# Altium PCB RF Board with STM32..PcbDoc
Units mm, origin at the board's own origin, x right, y up, seen from the top; angles counter-clockwise.
Board outline 40.39 x 30.25 mm, 4 copper layers (Top Layer, Layer 1, Layer 2, Bottom Layer), stack 0.603 mm thick; 36 components, 32 nets, 153 pads, 44 vias.
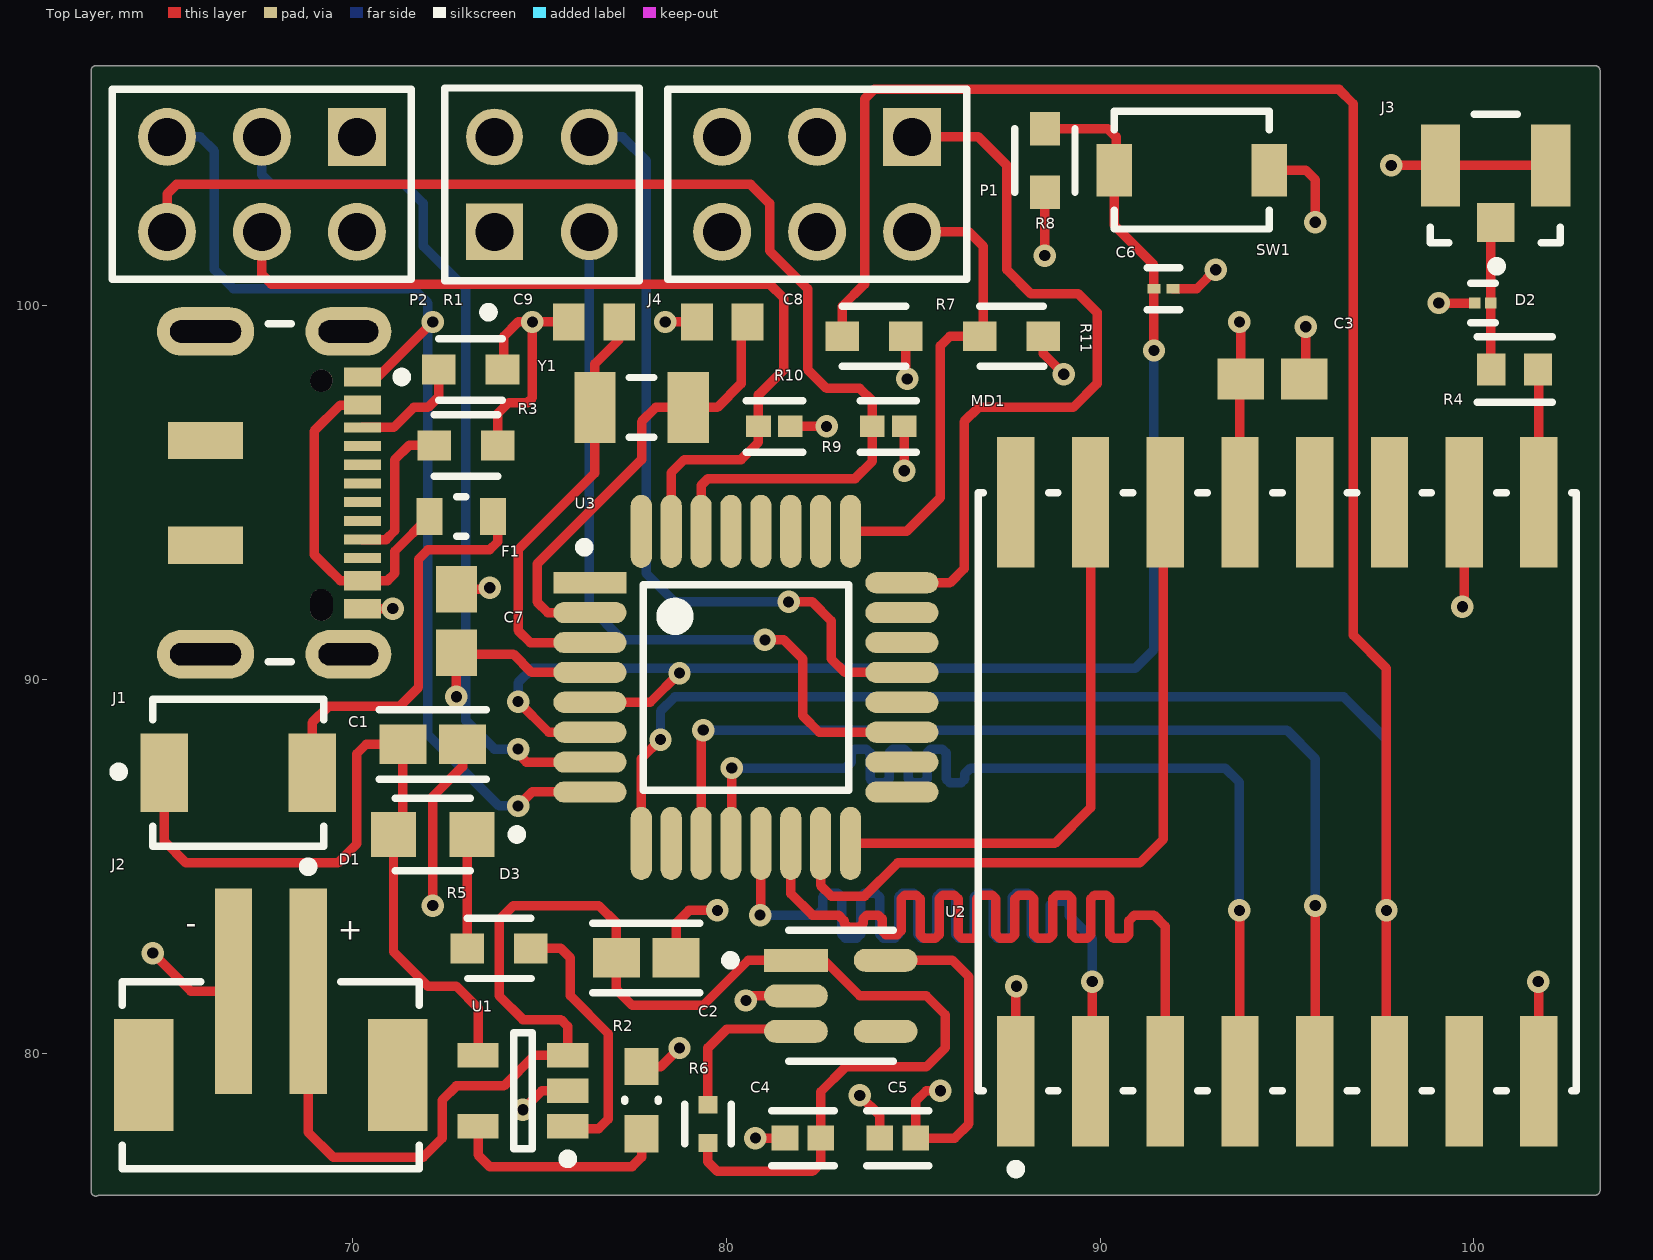
[diagram p0: Top Layer view]
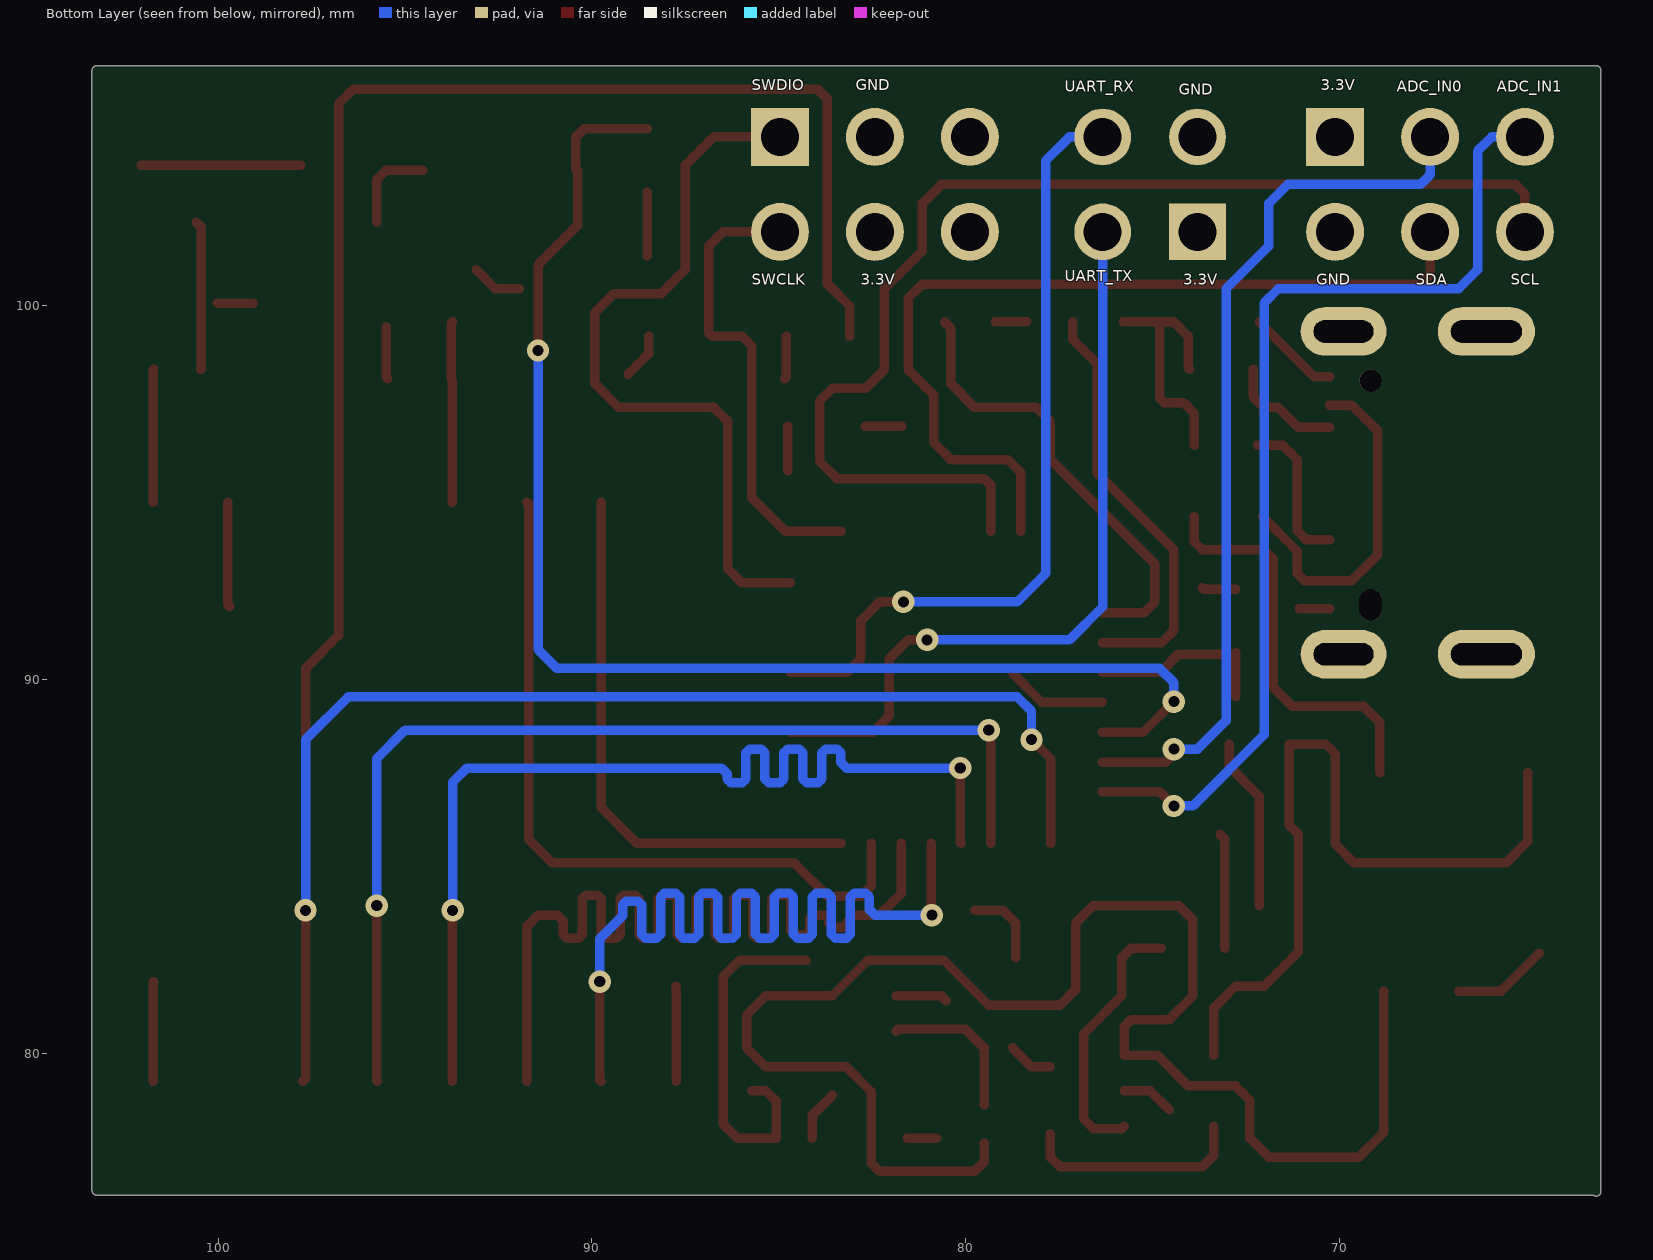
[diagram p1: Bottom Layer view, seen from below]
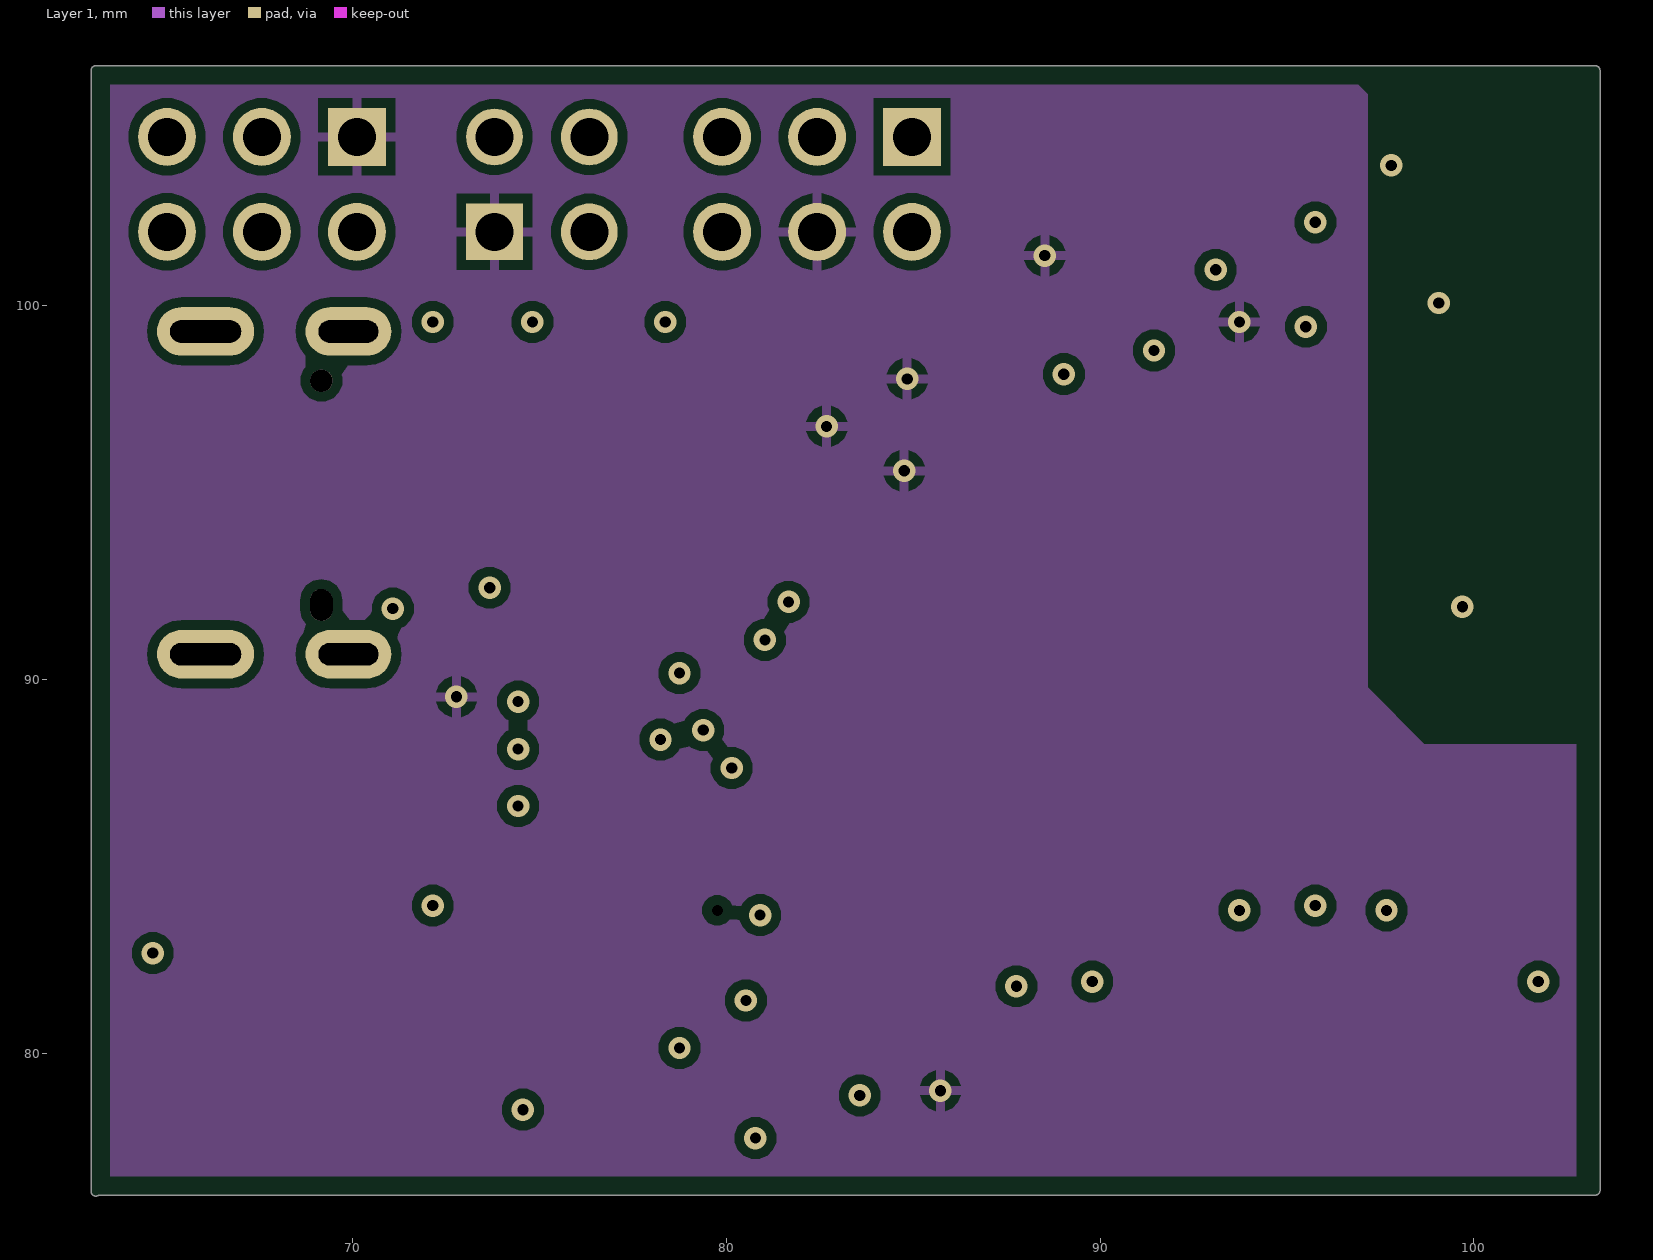
[diagram p2: Layer 1]
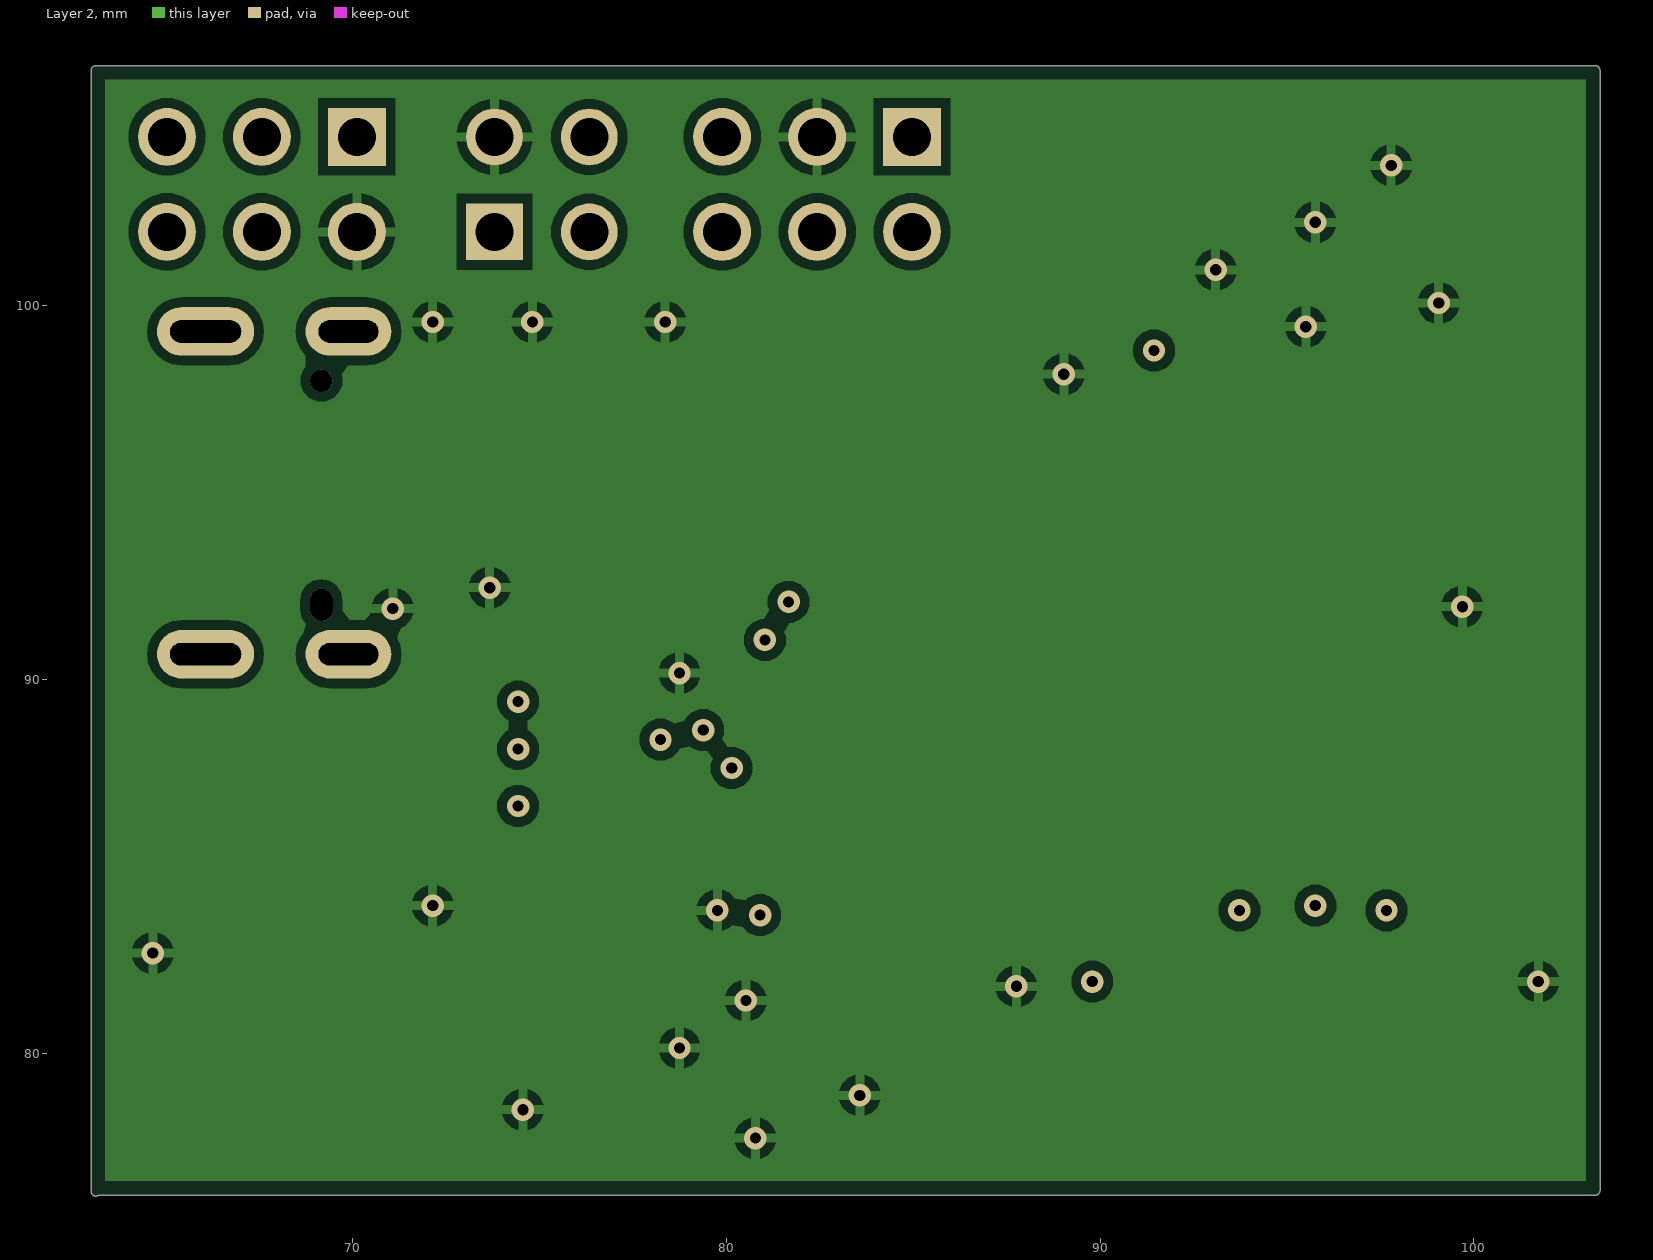
[diagram p3: Layer 2]
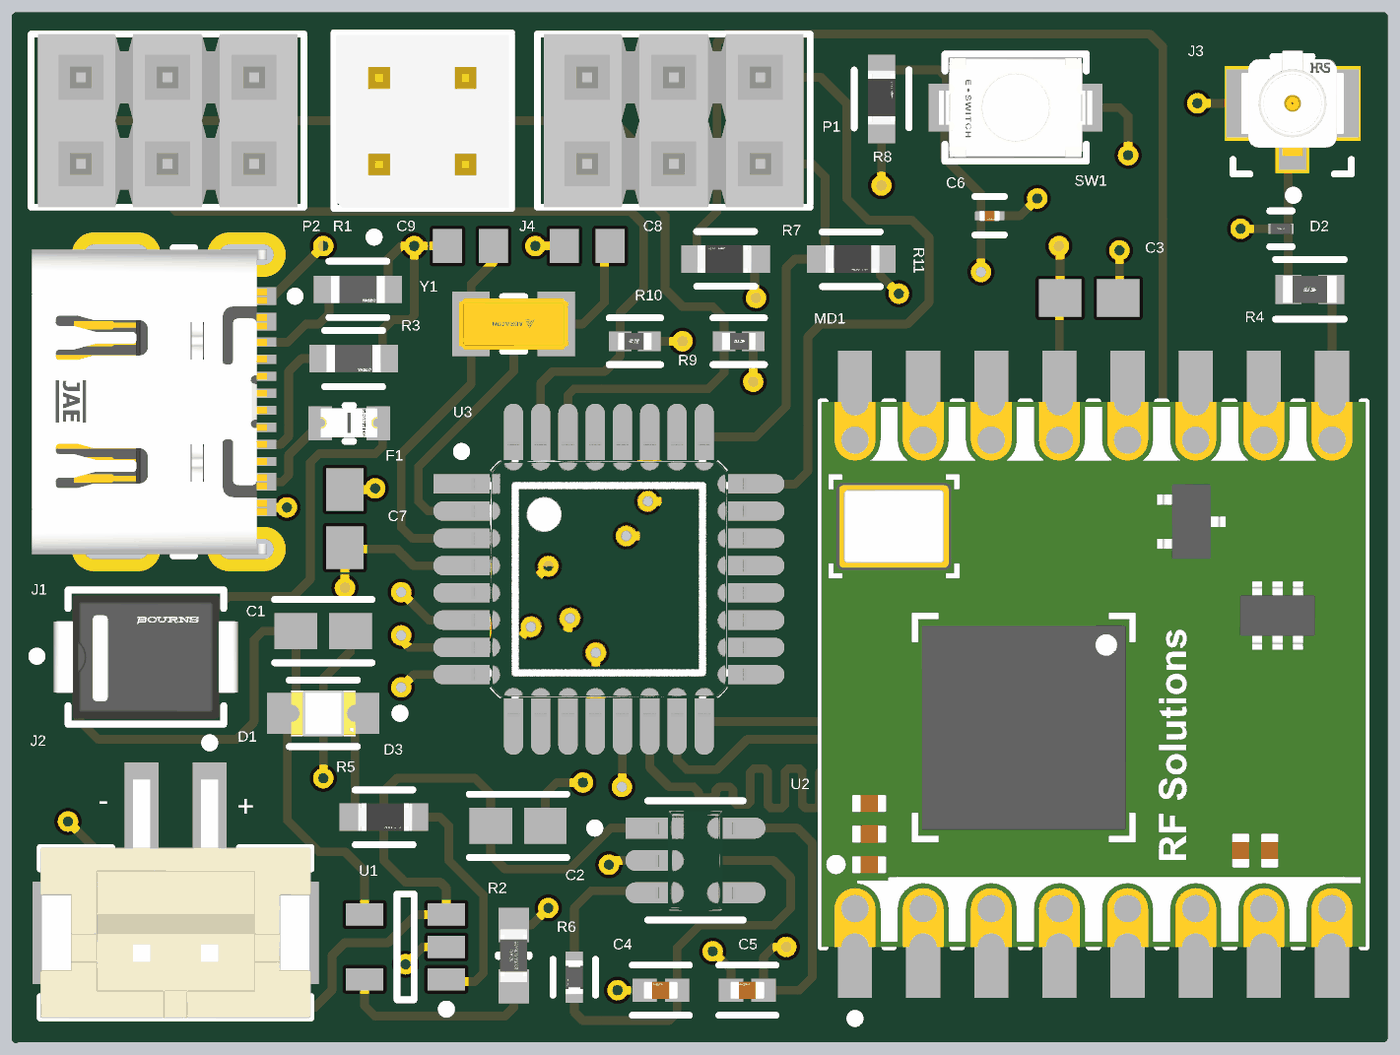
[diagram p4: 3D render of the assembled board from above, using the file's embedded part models]

## Layer stack, top to bottom
Top Solder: solder mask 0.0102, Solder Resist, Dk 3.5
Top Layer: signal copper 0.0356
Dielectric 2: prepreg 0.0711, PP-006, Dk 4.1
Layer 1: signal copper 0.035
Dielectric 1: dielectric 0.32, FR-4, Dk 4.8
Layer 2: signal copper 0.035
Dielectric 3: prepreg 0.0711, PP-006, Dk 4.1
Bottom Layer: signal copper 0.0356
Bottom Solder: solder mask 0.0102, Solder Resist, Dk 3.5

## Board outline
62.992,76.3 62.992,106.3 cw(c63.119,106.3) 63.133,106.426 103.251,106.426 cw(c103.251,106.299) 103.378,106.299 103.378,76.328 103.378,76.327 cw(c103.251,76.327) 103.251,76.2 63.198,76.2 cw(c63.119,76.3)

## Design rules (kind name [scope] priority, off if disabled: settings)
Clearance [All] p1: gap=0.254 ignorepadtopadclearanceinfootprint=TRUE
PolygonConnect [All] p1: connectstyle=Relief reliefconductorwidth=0.254 reliefentries=4 polygonreliefangle="90 Angle" airgapwidth=0.254
RoutingVias [All] p1: holewidth=0.711 width=1.27 viastyle="Through Hole" minholewidth=0.3 minwidth=0.6 maxholewidth=0.711 maxwidth=1.27
SolderMaskExpansion [All] p1: expansion=0.102 istentingtop=FALSE
SupplyNets "Schematic Supply Nets_1" [InNet('GND')] p1: voltage=0.000
SupplyNets "Schematic Supply Nets" [InNet('3.3V')] p2: voltage=0.000
Width [All] p1: maxlimit=0.254 minlimit=0.254 preferedwidth=0.254
30 further rules are at their usual default settings.

## Components (designator, comment, footprint, x,y, rotation, side; value= is the part's Value field where it differs from the comment)
C1 "GRM188R61E475KE11J" FP-GRM188-0_15-IPC_A 72.136,88.265 r0 top
C2 "GRM188R61E475KE11J" FP-GRM188-0_15-IPC_A 77.851,82.55 r0 top
C3 "06031A100CAT2A" CAPC1608X90X35ML15T15 94.615,98.044 r180 top
C4 "GRM155C81A105KA12J" FP-GRM155-0_05-IPC_A 82.042,77.724 r180 top
C5 "GRM155C81A105KA12J" FP-GRM155-0_05-IPC_A 84.582,77.724 r180 top
C6 "GRM033R61A104KE15D" FP-GRM033-0_03-IPC_C 91.694,100.457 r0 top
C7 "06031A100CAT2A" CAPC1608X90X35ML15T15 72.771,91.567 r270 top
C8 "VJ0603Y104KXJAC" CAPC1608X92X38NL15T08 79.883,99.568 r0 top
C9 "VJ0603Y104KXJAC" CAPC1608X92X38NL15T08 76.454,99.568 r0 top
D1 "SMBJ5.0A" FP-SMBJ-MFG 66.929,87.503 r0 top
D2 "ESD7181MUT5G" FP-152AF-MFG 100.242,100.076 r180 top
D3 "LS R976-NR-1" FP-LS_R976-MFG 72.136,85.852 r180 top
F1 "MF-FSMF050X-2" FP-MF-FSMF-MFG 72.898,94.361 r0 top value=0.1-0.8Ω
J1 "DX07S016JA1R1500" FP-DX07S016JA1R1500-MFG 67.056,94.996 r270 top
J2 "B2B-PH-SM4-TB(LF)(SN)" FP-B2B-PH-SM4-TB_LF_SN-MFG 67.802,79.411 r180 top
J3 "U.FL-R-SMT-1(80)" FP-U_FL-R-SMT-1_80-MFG 100.584,103.759 r0 top
J4 "HTSW-102-07-G-D" FP-HTSW-102-07-G-D-MFG 75.057,103.251 r0 top
MD1 "RFM95W-868S2" FP-RFM95W-868S2-MFG 94.742,86.995 r90 top
P1 "TSW-103-08-G-D" SMTC-TSW-103-08-X-D 84.963,104.521 r180 top
P2 "TSW-103-08-F-D" SMTC-TSW-103-08-X-D 70.104,104.521 r180 top
R1 "AC0603FR-075K1L" FP-AC0603-MFG 73.152,98.298 r0 top
R2 "RP73PF1J2K0BTDF" FP-RP73P-1J-MFG 77.724,78.74 r90 top value=2KΩ
R3 "AC0603FR-075K1L" FP-AC0603-MFG 73.025,96.266 r0 top
R4 "CRG0603ZR" FP-CRG0603-IPC_C 101.092,98.298 r180 top
R5 "RT0603BRD07470RL" FP-RT0603-MFG 73.914,82.804 r0 top value=470Ω
R6 "ERJ-U02F1003X" FP-ERJU02-MFG 79.502,78.105 r90 top
R7 "RT0603FRE1010KL" FP-RT0603-MFG 83.947,99.187 r180 top value=10KΩ
R8 "RT0603FRE1010KL" FP-RT0603-MFG 88.519,103.886 r90 top value=10KΩ
R9 "CRG0402F4K7" FP-CRG0402-IPC_B 84.328,96.774 r180 top
R10 "CRG0402F4K7" FP-CRG0402-IPC_B 81.28,96.774 r0 top
R11 "RT0603FRE1010KL" FP-RT0603-MFG 87.63,99.187 r0 top value=10KΩ
SW1 "TL1015AF160QG" FP-TL1015AF160QG-MFG 92.456,103.632 r180 top
U1 "MCP73831T-4ADI/OT" SOT-23-OT5_N 74.549,78.994 r180 top
U2 "AP2112K-3.3TRG1" FP-SOT25-IPC_A 83.058,81.534 r0 top
U3 "STM32G030K8T6" FP-LQFP32-5V-IPC_A 80.518,89.789 r0 top
Y1 "ABS07-32.768KHZ-7-T" FP-ABS07-MFG 77.724,97.282 r180 top

## Footprints (in the part's own frame and the unit in brackets; to place one, negate y for a bottom-side part, rotate by r counter-clockwise, add the part's x,y. Pads: shape width x height; smd on the part's side, far side on the other; paste and mask are expansions set on the pad)
CAPC1608X90X35ML15T15 [mm] "Chip Capacitor, 2-Leads, Body 1.60x0.81mm, IPC Low Density"
  rect 1.25x1.1 smd: 1(-0.85,0) 2(0.85,0)
  body extent -0.88,-0.48 0.87,0.48, height 0.9
CAPC1608X92X38NL15T08 [mm] "Chip Capacitor, 2-Leads, Body 1.60x0.80mm, IPC Medium Density"
  rect 0.85x1 smd: 1(-0.675,0) 2(0.675,0)
  body extent -0.87,-0.48 0.87,0.47, height 0.92
FP-152AF-MFG [mm]
  rect 0.31x0.3 smd paste+0 mask+0: 1(-0.215,0) 2(0.215,0)
  silkscreen extent -0.33,-0.53 0.33,0.53, body extent -0.47,-0.28 0.47,0.28, height 0.25
FP-ABS07-MFG [mm]
  rect 1.1x1.9 smd paste+0 mask+0: 1(-1.25,0) 2(1.25,0)
  silkscreen extent -0.33,-0.8 0.33,0.8, body extent -1.9,-1.05 1.9,1.05, height 0.25
FP-AC0603-MFG [mm]
  rect 0.9x0.8 smd paste+0 mask+0: 1(-0.85,0) 2(0.85,0)
  silkscreen extent -0.85,-0.82 0.85,0.82, body extent -1.4,-0.55 1.4,0.55, height 0.25
FP-B2B-PH-SM4-TB_LF_SN-MFG [mm]
  rect 1x5.5 smd paste+0 mask+0: 1(-1,-2.25) 2(1,-2.25)
  rect 1.6x3 smd paste+0 mask+0: 3(-3.4,0) 4(3.4,0)
  silkscreen extent -3.98,-5.7 3.98,2.5, body extent -4.3,-5.1 4.3,2.6, height 0.25
FP-CRG0402-IPC_B [mm]
  rect 0.66x0.572 smd paste+0 mask+0: 1(-0.426,0) 2(0.426,0)
  silkscreen extent -0.76,-0.69 0.76,0.69, body extent -0.91,-0.44 0.91,0.44, height 0.25
FP-CRG0603-IPC_C [mm]
  rect 0.758x0.858 smd paste+0 mask+0: 1(-0.627,0) 2(0.627,0)
  silkscreen extent -1.01,-0.87 1.01,0.87, body extent -1.11,-0.58 1.11,0.58, height 0.25
FP-DX07S016JA1R1500-MFG [mm]
  rrect100% 1.3x2.3 hole 1.6 slot 0.6 at 0 deg paste-2539.97 mask+0: 1(-4.32,2.825) 2(4.32,2.825)
  rrect100% 1.3x2.6 hole 1.9 slot 0.6 at 0 deg paste-2539.97 mask+0: 3(-4.32,-1) 6(4.32,-1)
  rect 1x2 smd paste+0 mask+0: 4(-1.4,-1) 5(1.4,-1)
  rect 0.52x1 smd paste+0 mask+0: A1/B12(-3.1,3.2) A4/B9(-2.35,3.2) A12/B1(3.1,3.2) B4/A9(2.35,3.2)
  rect 0.27x1 smd paste+0 mask+0: A5(-1.75,3.2) A6(-0.25,3.2) A7(0.75,3.2) A8(1.75,3.2) B5(1.25,3.2) B6(0.25,3.2) B7(-0.75,3.2) B8(-1.25,3.2)
  round 0.6 hole 0.6 unplated paste-2539.97 mask+0: ""(-3,2.1)
  rrect100% 0.85x0.6 hole 0.6 slot 0.85 at 0 deg unplated paste-2539.97 mask+0: ""(3,2.1)
  silkscreen extent -4.52,0.67 4.52,4.38, body extent -5.07,-3.75 5.07,4.08, height 0.25
FP-ERJU02-MFG [mm]
  rect 0.475x0.5 smd paste+0 mask+0: 1(-0.512,0) 2(0.513,0)
  silkscreen extent -0.53,-0.63 0.53,0.63, body extent -0.85,-0.38 0.85,0.38, height 0.25
FP-GRM033-0_03-IPC_C [mm]
  rect 0.354x0.263 smd paste+0 mask+0: 1(-0.254,0) 2(0.254,0)
  silkscreen extent -0.43,-0.57 0.43,0.57, body extent -0.53,-0.27 0.53,0.27, height 0.25
FP-GRM155-0_05-IPC_A [mm]
  rect 0.715x0.672 smd paste+0 mask+0: 1(-0.479,0) 2(0.479,0)
  silkscreen extent -0.84,-0.74 0.84,0.74, body extent -1.04,-0.54 1.04,0.54, height 0.25
FP-GRM188-0_15-IPC_A [mm]
  rect 1.256x1.058 smd paste+0 mask+0: 1(-0.801,0) 2(0.801,0)
  silkscreen extent -1.43,-0.93 1.43,0.93
FP-HTSW-102-07-G-D-MFG [mm]
  rect 1.52x1.52 hole 1.02 paste-2539.97 mask+0: 1(-1.27,-1.27)
  round 1.52 hole 1.02 paste-2539.97 mask+0: 2(-1.27,1.27) 3(1.27,-1.27) 4(1.27,1.27)
  silkscreen extent -2.6,-3.54 2.6,2.58, body extent -2.7,-2.68 2.7,2.68, height 0.25
FP-LQFP32-5V-IPC_A [mm]
  rect 1.955x0.566 smd paste+0 mask+0: 1(-4.175,2.8)
  rrect100% 1.955x0.566 smd paste+0 mask+0: 2(-4.175,2) 3(-4.175,1.2) 4(-4.175,0.4) 5(-4.175,-0.4) 6(-4.175,-1.2) 7(-4.175,-2) 8(-4.175,-2.8) 17(4.175,-2.8) 18(4.175,-2) 19(4.175,-1.2) 20(4.175,-0.4) 21(4.175,0.4) 22(4.175,1.2) 23(4.175,2) 24(4.175,2.8)
  rrect100% 0.566x1.955 smd paste+0 mask+0: 9(-2.8,-4.175) 10(-2,-4.175) 11(-1.2,-4.175) 12(-0.4,-4.175) 13(0.4,-4.175) 14(1.2,-4.175) 15(2,-4.175) 16(2.8,-4.175) 25(2.8,4.175) 26(2,4.175) 27(1.2,4.175) 28(0.4,4.175) 29(-0.4,4.175) 30(-1.2,4.175) 31(-2,4.175) 32(-2.8,4.175)
  silkscreen extent -4.45,-2.75 2.75,3.87, body extent -5.65,-5.65 5.65,5.65, height 0.25
FP-LS_R976-MFG [mm]
  rect 1.2x1.2 smd paste+0 mask+0: 1(-1.05,0) 2(1.05,0)
  silkscreen extent -2.38,-0.97 1,0.97, body extent -1.75,-0.8 1.75,0.8, height 0.25
FP-MF-FSMF-MFG [mm]
  rect 0.7x1 smd paste+0 mask+0: 1(-0.85,0) 2(0.85,0)
  silkscreen extent -0.13,-0.53 0.13,0.53, body extent -1.3,-0.63 1.3,0.63, height 0.25
FP-RFM95W-868S2-MFG [mm]
  rect 3.5x1 smd paste+0 mask+0: 1(-7.75,7) 2(-7.75,5) 3(-7.75,3) 4(-7.75,1) 5(-7.75,-1) 6(-7.75,-3) 7(-7.75,-5) 8(-7.75,-7) 9(7.75,-7) 10(7.75,-5) 11(7.75,-3) 12(7.75,-1) 13(7.75,1) 14(7.75,3) 15(7.75,5) 16(7.75,7)
  silkscreen extent -10.22,-8 8,8, body extent -9.6,-8.1 9.6,8.1, height 0.25
FP-RP73P-1J-MFG [mm]
  rect 1x0.9 smd paste+0 mask+0: 1(-0.9,0) 2(0.9,0)
  silkscreen extent -0.03,-0.45 0.03,0.45, body extent -1.5,-0.55 1.5,0.55, height 0.25
FP-RT0603-MFG [mm]
  rect 0.9x0.8 smd paste+0 mask+0: 1(-0.85,0) 2(0.85,0)
  silkscreen extent -0.85,-0.81 0.86,0.8, body extent -1.4,-0.55 1.4,0.55, height 0.25
FP-SMBJ-MFG [mm]
  rect 1.27x2.1 smd paste+0 mask+0: 1(-1.98,0) 2(1.98,0)
  silkscreen extent -3.32,-1.97 2.28,1.97, body extent -2.72,-2.07 2.72,2.07, height 0.25
FP-SOT25-IPC_A [mm]
  rect 1.707x0.616 smd paste+0 mask+0: 1(-1.201,0.95)
  rrect100% 1.707x0.616 smd paste+0 mask+0: 2(-1.201,0) 3(-1.201,-0.95) 4(1.201,-0.95) 5(1.201,0.95)
  silkscreen extent -3.08,-1.75 1.4,1.75, body extent -2.55,-2 2.55,2, height 0.25
FP-TL1015AF160QG-MFG [mm]
  rect 0.95x1.4 smd paste+0 mask+0: 1(-2.075,0) 2(2.075,0)
  silkscreen extent -2.07,-1.58 2.07,1.58, body extent -2.65,-1.68 2.65,1.68, height 0.25
FP-U_FL-R-SMT-1_80-MFG [mm]
  rect 1x1.05 smd paste-1000 mask+0: 1(0,-1.525)
  rect 1.05x2.2 smd paste-1000 mask+0: 2(-1.475,0) 3(1.475,0)
  silkscreen extent -1.75,-2.82 1.73,1.38, body extent -2.1,-2.15 2.1,1.73, height 0.25
SMTC-TSW-103-08-X-D [mm] ".025 SQ Post Terminal Strip Assembly, 2x3 Pins, Vertical, 2.54mm Pitch, Male"
  rect 1.55x1.55 hole 1.02: 1(0,0)
  round 1.55 hole 1.02: 2(0,2.54) 3(2.54,0) 4(2.54,2.54) 5(5.08,0) 6(5.08,2.54)
  silkscreen extent -1.46,-1.27 6.54,3.81, body extent -1.27,-1.27 6.35,3.81, height 8.38
SOT-23-OT5_N [mm] "SOT23, 5-Leads, Body 2.9x1.7mm, Pitch 0.95mm, Lead Span 2.8mm, IPC Medium Density"
  rect 1.1x0.65 smd: 1(-1.2,0.95) 2(-1.2,0) 3(-1.2,-0.95) 4(1.2,-0.95) 5(1.2,0.95)
  silkscreen extent -1.33,-1.55 0.25,1.95, body extent -0.9,-1.55 0.9,1.55, height 1.45

## Part data
C1 C2: library part CMP-06035-051692-1, "Chip Multilayer Ceramic Capacitors for General Purpose, 0603, 4.7uF, X5R, 15%, 10%, 25V", Capacitance=4.7uF, Case/Package=0603, Dielectric=X5R, Max Operating Temperature=85°C, Min Operating Temperature=-55°C, Package Quantity=10000, Tolerance=10%, Voltage Rating=25V, Length=0.063inch, Mount="Surface Mount", Packaging="Tape and Reel", Thickness=0.037inch, Voltage Rating (DC)=25V, Weight=0.000222oz, Width=0.031inch
C3 C7: library part CMP-2006-03979-1, Manufacturer="AVX Interconnect / Elco", Part Number=06031A100CAT2A
C4 C5: library part CMP-06035-052171-1, "Chip Multilayer Ceramic Capacitors for General Purpose, 0402, 1.0uF, X6S, 22%, 10%, 10V", Capacitance=1uF, Case/Package=0402, Dielectric=X6S, Max Operating Temperature=105°C, Min Operating Temperature=-55°C, Package Quantity=50000, Tolerance=10%, Voltage Rating=10V, Length=0.039inch, Mount="Surface Mount", Packaging="Tape and Reel", Thickness=0.022inch, Voltage Rating (DC)=10V, Weight=0.000212oz, Width=0.02inch
C6: library part CMP-2010-01264-2, "Chip Multilayer Ceramic Capacitors for General Purpose, 0201, 0.10uF, X5R, 15%, 10%, 10V", Capacitance=100nF, Case Code (Imperial)=0201, Case Code (Metric)=0603, Dielectric=X5R, Max Operating Temperature=85°C, Min Operating Temperature=-55°C, Package Quantity=1, Tolerance=10%, Voltage=10V, Case/Package=0201, Depth=0.3mm, Height=0.3mm, Lead Free="Lead Free", Length=0.6mm, Mount="Surface Mount", Packaging="Tape and Reel", Radiation Hardening=No, REACH SVHC="No SVHC", Termination=SMD/SMT, Thickness=0.013inch, Voltage Rating=10V, Voltage Rating (DC)=10V, Weight=6E-06oz, Width=0.012inch
C8 C9: library part CMP-2006-01976-1, Manufacturer=Vitramon, Part Number=VJ0603Y104KXJAC
D1: library part CMP-07401-000003-1, "TVS DIODE 5V 9.2V SMB", Breakdown Voltage=6.4V, Clamping Voltage=9.2V, Manufacturer="Bourns Inc.", Max Junction Temp=+150°C, Package=SMBJ, Peak Pulse Current=65.3A, Peak Pulse Power=600W, Reverse Standoff Voltage=5V, Temperature="-55°C to +150°C", Temperature Range Low=-55°C, Automotive=No, Category=Diode, ComponentLink2Description=Datasheet, ComponentLink2URL=https://www.bourns.com/docs/Product-Datasheets/SMBJ.pdf, Device Class L1="Circuit Protection", Device Class L2="TVS Diodes", Device Class L3=unset, Digikey Description="TVS DIODE 5V 9.2V SMB", Direction=Unidirectional, Height=2.44mm, Lead Free=Yes, Manufacturer Part Number=SMBJ5.0A, Mouser Description="Dio Tvs Vwm 5.0V 600W Unidir Smb Rohs Compliant: Yes", Number of Channels=1, Octopart=https://octopart.com/smbj5.0a-bourns-12809487, RoHS=TRUE, Standoff Height=0.05mm, Temperature Range High=+150°C
D2: library part CMP-00278-33922270-1, "ESD7181MUT5G ESD Suppressor Diode TVS Bi-Dir 18.5V 2-Pin X3-DFN T/R / TVS DIODE 18.5VWM 35VC", Capacitance=600fF, Case/Package=DFN, Clamping Voltage=35V, Manufacturer Lifecycle Status=ACTIVE, Max Operating Temperature=150°C, Min Breakdown Voltage=20.5V, Min Operating Temperature=-55°C, Operating Supply Voltage=18.5V, Peak Pulse Current=1A, Power Line Protection=No, Composition=Zener, Contact Plating=Gold, Direction=Bidirectional, Element Configuration=Single, Lead Free="Lead Free", Lifecycle Status=Production, Mount="Surface Mount", NexarPartId=33922270, Number of Bidirectional Channels=1, Number of Pins=2, Packaging="Tape & Reel (TR)", Reverse Standoff Voltage=18.5V, RoHS=Compliant, Schedule B=8536300000, Working Voltage=18.5V
D3: library part CMP-62016-000037-1, "LED RED DIFFUSED 0805 SMD", Case Code (Imperial)=0805, Case Code (Metric)=2012, Color=Red, Forward Current=25mA, Forward Voltage=2.5V, Lens Color=White, Max Operating Temperature=85°C, Min Operating Temperature=-30°C, Package Quantity=16000, Power Dissipation=65W, Reverse Voltage=12V, Test Current=20mA, Case/Package=0805, Depth=1.35mm, Dominant Wavelength=633nm, Height=0.9mm, Illumination Color=Red, Length=2mm, Lens Size=1.25mm, Lens Style=Flat, Lens Transparency=Diffused, Luminous Flux=0.47lm, Luminous Intensity=180mcd, Mount="Surface Mount", Number of Elements=1, Number of LEDs=1, Number of Pins=2, Packaging="Tape and Reel", Radiation Hardening=No, Viewing Angle=160°, Width=1.25mm
F1: library part CMP-07400-000010-1, "PTC RESET FUSE 6V 500MA 0603", Ambient Temperature Range High=+85°C, Ambient Temperature Range Low=-40°C, Current Rating=40A, Hold Current=0.5A, Manufacturer="Bourns Inc.", Package=MF-FSMF, Resistance=0.1-0.8Ω, Temperature="-40°C to +85°C", Trip Current=1A, Voltage Rating=6V, Automotive=No, Category=Fuse, ComponentLink2Description=Datasheet, ComponentLink2URL=https://www.bourns.com/docs/Product-Datasheets/mffsmf.pdf, Device Class L1="Circuit Protection", Device Class L2="PTC Resettable Fuses", Device Class L3=unset, Digikey Description="PTC RESET FUSE 6V 500MA 0603", Height=1mm, Lead Free=Yes, Manufacturer Part Number=MF-FSMF050X-2, Mouser Description="Resettable Fuses - PPTC 6volts 40amps", Octopart=https://octopart.com/mf-fsmf050x-2-bourns-10470804, RoHS=TRUE, Temperature Range High=+85°C, Temperature Range Low=-40°C, Trip Time=0.1s
J1: library part CMP-19038-000003-1, "CONN RCP USB2.0 TYP C 24P SMD RA"
J2: library part CMP-2000-05163-2, "CONN HEADER SMD 2POS 2MM", Color=White, Contact Resistance=20mR, Current Rating=2A, Flammability Rating="UL94 V-0", Housing Color=Beige, Insulation Color=Natural, Insulation Resistance=1GR, Max Operating Temperature=85°C, Max Voltage Rating (AC)=100V, Min Operating Temperature=-25°C, Connector Type=Header, Contact Finish - Mating=TIN, Contact Material="Copper Alloy", Contact Mating Length=0.13inch, Contact Plating=Tin, Contact Shape=Square, Contact Type="Male Pin", Depth=5mm, Fastening Type=Detent, Gender=Male, Height=9.4mm, Housing Material=Polyamide, Insulation Material=Nylon, Lead Free="Lead Free", Lead Pitch=2mm, Length=7.95mm, Mated Stacking Heights=8.6mm, Max Current Rating=2A, Mount="Surface Mount", Number of Contacts=2, Number of Poles=2, Number of Positions=2, Number of Rows=1, Orientation=Straight, Packaging="Tape and Reel", Pitch=2mm, REACH SVHC="No SVHC", Series=PH, Termination=Solder, Voltage Rating=100V, Voltage Rating (AC)=100V, Width=5.5mm, Working Voltage=100V
J3: library part CMP-11598-000004-1, "CONN U.FL RCPT STR 50 OHM SMD", Case/Package=SMD/SMT, Dielectric Material=Polymer, Housing Color=Beige, Max Frequency=6GHz, Max Operating Temperature=90°C, Min Operating Temperature=-40°C, Package Quantity=10000, Body Material=Bronze, Body Plating=Silver, Center Contact Plating=Gold, Connector Type=Receptacle, Contact Material=Brass, Fastening Type=SNAP-ON, Impedance=50R, Lead Free="Lead Free", Mating Cycles=30, Mount="Surface Mount", Number of Ports=1, Packaging="Tape and Reel", RoHS Compliant=Yes, Series=U.FL, Termination=Solder
J4: library part CMP-02766-000010-1, "CONN HEADER VERT 4POS 2.54MM", Current Rating=6.3A, Manufacturer=Samtec, Temperature="-55°C to +125°C", Temperature Range High=+125°C, Temperature Range Low=-55°C, Voltage Rating=550V, Automotive=No, Category=Conn, ComponentLink2Description=Datasheet, ComponentLink2URL=http://suddendocs.samtec.com/catalog_english/htsw_th.pdf, Conn Gender=Male, Conn Orientation=Straight, Contact Material=Gold,Nickel, Device Class L1=Connectors, Device Class L2="Headers and Wire Housings", Device Class L3=unset, Digikey Description="CONN HEADER VERT 4POS 2.54MM", Height=8.71mm, Lead Free=Yes, Manufacturer Part Number=HTSW-102-07-G-D, Mouser Description="Conn Unshrouded Header HDR 4 POS 2.54mm Solder ST Thru-Hole Bag", Number of Contacts=4, Number of Rows=2, Octopart=https://octopart.com/htsw-102-07-g-d-samtec-10531767, Package=HTSW-102-07-G-D, Pitch=2.54mm, RoHS=TRUE
MD1: library part CMP-204316-000001-1, "RX TXRX MODULE ISM < 1GHZ SMD", Case/Package=SMD/SMT, Current - Receiving=12.1mA, Current - Transmitting=120mA, Frequency=868MHz, Max Operating Temperature=70°C, Min Operating Temperature=-20°C, Data Rate=300Kbps, Interface=SPI, Mount="Surface Mount", Packaging=Bulk, Sensitivity=-123dBm
P1: library part CMP-1024-00338-1, "0.025\" SQ Post Header, Through-hole, Vertical, -55 to 125 degC, 2.54 mm Pitch, 6-Pin, Male, RoHS", Manufacturer=Samtec, Temperature Range="-55 to 125 degC", ComponentLink1Description="Manufacturer URL", ComponentLink1URL=http://www.samtec.com, ComponentLink2Description=Datasheet, ComponentLink2URL=http://www.samtec.com/documents/webfiles/pdf/TSW_TH.PDF, ComponentLink3Description="Package Specification", ComponentLink3URL=http://www.samtec.com/documents/webfiles/cpdf/TSW-XXX-XX-XXX-X-XX-XXX-MKT.pdf, DatasheetVersion=F-214, Mounting Technology=Through-hole, Orientation=Vertical, PackageDescription=".025[0.64] SQ. Post Terminal Strip Assembly", PackageReference=TSW-103-08-X-D, PackageVersion="DM, 8/1988", PartNumber=TSW-103-08-G-D, Pitch="2.54 mm", RoHS=True
P2: library part CMP-1024-00337-1, "0.025\" SQ Post Header, Through-hole, Vertical, -55 to 125 degC, 2.54 mm Pitch, 6-Pin, Male, RoHS", Manufacturer=Samtec, Temperature Range="-55 to 125 degC", ComponentLink1Description="Manufacturer URL", ComponentLink1URL=http://www.samtec.com, ComponentLink2Description=Datasheet, ComponentLink2URL=http://www.samtec.com/documents/webfiles/pdf/TSW_TH.PDF, ComponentLink3Description="Package Specification", ComponentLink3URL=http://www.samtec.com/documents/webfiles/cpdf/TSW-XXX-XX-XXX-X-XX-XXX-MKT.pdf, DatasheetVersion=F-214, Mounting Technology=Through-hole, Orientation=Vertical, PackageDescription=".025[0.64] SQ. Post Terminal Strip Assembly", PackageReference=TSW-103-08-X-D, PackageVersion="DM, 8/1988", PartNumber=TSW-103-08-F-D, Pitch="2.54 mm", RoHS=True
R1 R3: library part CMP-03412-025080-2, "RES 5.1KΩ 1.00% 0.1W 0603", Case Code (Imperial)=0603, Case Code (Metric)=1608, Max Operating Temperature=155°C, Max Power Dissipation=100mW, Min Operating Temperature=-55°C, Ratings=AEC-Q200, Resistance=5.1kR, Resistor Type="Thick Film", Temperature Coefficient=100ppm/°C, Tolerance=1%, Voltage Rating=50V, Case/Package=0603, Features="Moisture Resistant", Height=0.45mm, Length=1.6mm, Number of Terminations=2, Packaging="Tape and Reel", Power Rating=100mW, RoHS Compliant=Yes, Series=AC, Termination=SMD/SMT, Weight=7.1E-05oz, Width=0.8mm
R2: library part CMP-03211-004349-1, "RES SMD 2K OHM 0.1% 1/6W 0603", Manufacturer="TE Connectivity", Package=RP73P-1J, Power Rating=0.166W, Resistance=2KΩ, Temperature="-55°C to +155°C", Temperature Coefficient=25ppm/°C, Temperature Range High=+155°C, Temperature Range Low=-55°C, Tolerance=0.001, Voltage Rating=100V, Automotive=No, Category=Res, ComponentLink2Description=Datasheet, ComponentLink2URL=https://www.te.com/commerce/DocumentDelivery/DDEController?Action=srchrtrv&DocNm=1773272&DocType=DS&DocLang=English, Composition="Thin Film", Device Class L1="Passive Components", Device Class L2=Resistors, Device Class L3="Chip SMD Resistors", Digikey Description="RES SMD 2K OHM 0.1% 1/6W 0603", Height=0.55mm, Ipc Land Pattern Name=RESC15580X45, Lead Free=Yes, Manufacturer Part Number=RP73PF1J2K0BTDF, Octopart=https://octopart.com/rp73pf1j2k0btdf-te+connectivity-23826916, RoHS=TRUE, Series=RP73P
R4: library part CMP-03211-011415-1, "RES SMD 0 OHM JUMPER 1/10W 0603", Case Code (Imperial)=0603, Case Code (Metric)=1608, Max Operating Temperature=125°C, Max Power Dissipation=100mW, Min Operating Temperature=-55°C, Number of Resistors=1, Package Quantity=5000, Resistance=0mR, Resistor Type="Thick Film", Temperature Coefficient=100ppm/°C, Tolerance=0%, Voltage Rating=50V, Case/Package=0603, Depth=0.8mm, ELV=Compliant, Height=0.45mm, Length=1.6mm, Mount="Surface Mount", Number of Terminations=2, Packaging="Tape and Reel", Power Rating=100mW, Radiation Hardening=No, RoHS Compliant=Yes, Series="CRG, Neohm", Technology="THICK FILM", Termination=Solder, Weight=7.1E-05oz, Width=0.8mm
R5: library part CMP-2000-04460-2, "RES SMD 470 OHM 0.1% 1/10W 0603", Manufacturer=Yageo, Package=RT0603, Power Rating=0.1W, Resistance=470Ω, Temperature="-55°C to +155°C", Temperature Coefficient="25 ppm/°C", Temperature Range High=+155°C, Temperature Range Low=-55°C, Tolerance=0.001, Voltage Rating=75V, Automotive=No, Category=Res, ComponentLink2Description=Datasheet, ComponentLink2URL=http://www.yageo.com/documents/recent/PYu-RT_1-to-0.01_RoHS_L_9.pdf, Composition="Thin Film", Device Class L1="Passive Components", Device Class L2=Resistors, Device Class L3="Chip SMD Resistors", Digikey Description="RES SMD 470 OHM 0.1% 1/10W 0603", Footprint Url=http://www.yageo.com/exep/pages/download/literatures/PYu-R_Mount_10.pdf, Height=0.55mm, Ipc Land Pattern Name=RESC16080X45, Lead Free=Yes, Manufacturer Part Number=RT0603BRD07470RL, Mouser Description="Res Thin Film 0603 470 Ohm 0.1% 1/10W ±25ppm/°C Molded SMD SMD Paper T/R", Octopart=https://octopart.com/rt0603brd07470rl-yageo-1424253, RoHS=TRUE, Series=RT
R6: library part CMP-2002-06461-2, Case Code (Imperial)=0402, Case Code (Metric)=1005, Current Rating=1A, Max Operating Temperature=155°C, Min Operating Temperature=-55°C, Power Rating=100mW, Resistance=100kΩ, Temperature Coefficient=200ppm/°C, Tolerance=1%, Voltage Rating=50V, Case/Package=0402, Composition="Thick Film", Height=350µm, Length=1mm, Lifecycle Status=Production, Mount="Surface Mount", NexarPartId=25970999, Packaging="Cut Tape", Radiation Hardening=No, REACH SVHC=Unknown, RoHS=Compliant, Schedule B="8533210045, 8533210045", Termination=SMD/SMT, Voltage Rating (DC)=50V, Weight=793.786648µg, Width=500µm
R7 R8 R11: library part CMP-03412-024264-1, "RT0603 10KΩ 0.1W 50 ppm/°C 1.00%", Manufacturer=Yageo, Package=RT0603, Power Rating=0.1W, Resistance=10KΩ, Temperature="-55°C to +155°C", Temperature Coefficient="50 ppm/°C", Temperature Range High=+155°C, Temperature Range Low=-55°C, Tolerance=0.01, Voltage Rating=75V, Automotive=No, Category=Res, ComponentLink2Description=Datasheet, ComponentLink2URL=http://www.yageo.com/documents/recent/PYu-RT_1-to-0.01_RoHS_L_9.pdf, Composition="Thin Film", Device Class L1="Passive Components", Device Class L2=Resistors, Device Class L3="Chip SMD Resistors", Footprint Url=http://www.yageo.com/exep/pages/download/literatures/PYu-R_Mount_10.pdf, Height=0.55mm, Ipc Land Pattern Name=RESC16080X45, Lead Free=Yes, Manufacturer Part Number=RT0603FRE1010KL, Octopart=https://octopart.com/rt0603fre1010kl-yageo-26185585, RoHS=TRUE, Series=RT
R9 R10: library part CMP-03211-011412-1, "RES SMD 4.7K OHM 1% 1/16W 0402", RoHS Compliant=Yes
SW1: library part CMP-17879-000003-1, "SWITCH TACTILE SPST-NO 0.05A 12V", Case/Package=SMD/SMT, Color=Beige, Contact Current Rating=50mA, Contact Resistance=100mR, Max Operating Temperature=70°C, Max Voltage Rating (DC)=12V, Min Operating Temperature=-20°C, Operating Force=160gf, Package Quantity=1, Actuator Length=0.5mm, Actuator Material=Nylon, Actuator Type=Standard, Contact Material=Silver, Contact Plating=Silver, Current Rating=50mA, Electrical Life=50000Cycles, Illumination Type=Non-Illuminated, Lead Free="Lead Free", Mechanical Life=200000Cycles, Mount="Surface Mount", Orientation=Straight, Packaging="Tape and Reel", REACH SVHC="No SVHC", Switch Function=Off-Mom, Switch Travel=0.2mm, Termination="Gull Wing", Throw Configuration=SPST, Voltage Rating (DC)=12V
U1: library part CMP-0133-00137-1, "Miniature Single-Cell, Fully Integrated Li-Ion, Li-Polymer Charge Management Controller, 4.4V, 5-Pin SOT-23, Industrial Temperature, Tape and Reel", Code_IPC=SOT23-5, DatasheetVersion="revE, Sep-2008", PackageDescription="5-Lead Plastic Small Outline Transistor (OT) [SOT-23]", PackageReference=SOT-23-OT5, PackageVersion="revBB, Aug-2009"
U2: library part CMP-12756-000035-1, "IC REG LINEAR 3.3V 600MA SOT25", Case/Package=SOT-23-5, Dropout Voltage=250mV, Max Input Voltage=6V, Max Operating Temperature=85°C, Max Output Current=600mA, Min Input Voltage=2.5V, Min Operating Temperature=-40°C, Output Voltage=3.3V, Package Quantity=1, Quiescent Current=55uA, Accuracy=1.5%, Height=1.3mm, Lead Free="Lead Free", Length=3.1mm, Mount="Surface Mount", Number of Outputs=1, Number of Pins=5, Number of Regulators=1, Output Current=600mA, Output Type=Fixed, Packaging="Tape and Reel", Polarity=Positive, Width=1.7mm
U3: library part CMP-12105-000136-1, "IC MCU 32BIT 64KB FLASH 32LQFP", RoHS Compliant=Yes
Y1: library part CMP-27762-014373-1, "Crystal 32.768kHz ±20ppm (Tol) 7pF FUND 70kΩ 2-Pin CSMD T/R", Case/Package=CSMD, ESR (Equivalent Series Resistance)=70kR, Frequency=32.768kHz, Frequency Stability=20ppm, Insulation Resistance=500MR, Load Capacitance=7pF, Max Operating Temperature=85°C, Min Operating Temperature=-40°C, Operating Frequency="32.768 kHz", Package Quantity=3000, Depth=1.5mm, Frequency Tolerance=20ppm, Height=0.9mm, Lead Free="Lead Free", Length=3.2mm, Mount="Surface Mount", Number of Pins=2, Packaging="Tape and Reel", Radiation Hardening=No, Series=ABS07, Series Resistance=70kR, Termination=SMD/SMT, Tolerance=20ppm, Width=1.5mm

## Via types
v1: diameter 0.6, hole 0.3, Top Layer to Layer 2, 22 vias
v2: diameter 0.6, hole 0.3, Top Layer to Bottom Layer, 13 vias
v3: diameter 0.6, hole 0.3, Top Layer to Layer 1, 7 vias
v4: diameter 0.6/0.6/0.6/0.6 (per signal layer), hole 0.3, Top Layer to Bottom Layer, 1 vias
v5: diameter 0.6/0/0.6 (per signal layer), hole 0.3, Top Layer to Layer 2, 1 vias

## Nets (pads, with @x,y where several pads share a name; then routed paths per layer and width w, separated by ;. In a path a pad name is that pad's centre, name@x,y a point inside that pad or via, vN(x,y) a via of type N, cw(c..) or ccw(c..) an arc to the next point about the centre after c; other vN are vias at no path point)
3.3V: C3.2 C5.1 C7.2 J4.1 MD1.13 P1.4 P2.1 R7.1 R8.1 R9.1 R10.2 U2.5 U3.4 | length 24.5
  Top Layer w0.254: v3(72.771,89.535) C7.2 72.81,90.678 74.295,90.678 74.784,90.189 U3.4 ; R10.2 v3(82.677,96.774) ; U2.5 86.045,82.484 86.487,82.042 86.487,78.105 86.106,77.724 C5.1 85.061,78.711 85.344,78.994 v3(85.725,78.994) ; v3(84.754,95.586) R9.1 ; R7.1 84.797,98.083 v3(84.836,98.044) ; v3(88.519,101.346) R8.1 ; v3(93.726,99.568) 93.765,99.529 C3.2 93.742,98.021 MD1.13
ADC_IN0: P2.3 U3.7 | length 23.8
  Top Layer w0.254: v2(74.422,88.138) 74.422,88.011 74.644,87.789 U3.7
  Bottom Layer w0.254: P2.3 67.564,103.505 67.818,103.251 71.374,103.251 71.882,102.743 71.882,101.6 73.025,100.457 73.025,88.9 73.787,88.138 v2(74.422,88.138)
ADC_IN1: P2.5 U3.8 | length 27.5
  Top Layer w0.254: v2(74.422,86.614) 74.797,86.989 U3.8
  Bottom Layer w0.254: P2.5 65.913,104.521 66.294,104.14 66.294,100.965 66.802,100.457 71.628,100.457 72.009,100.076 72.009,88.519 73.914,86.614 v2(74.422,86.614)
ANT: D2.1 J3.1 R4.2 | length 4
  Top Layer w0.254: R4.2 100.457,98.306 D2.1 100.457,102.107 J3.1
GND: C1.2 C2.2 C3.1 C4.2 C5.2 C6.2 C7.1 C8.1 C9.1 D2.2 J1.A1/B12 J1.A12/B1 J2.2 J3.2 J3.3 J4.2 MD1.1 MD1.8 MD1.10 P1.3 P2.2 R1.2 R2.2 R3.2 R11.2 SW1.1 U1.2 U2.2 U3.5 | length 49.9
  Top Layer w0.254: v1(64.643,82.677) 65.659,81.661 J2.2 ; J1.A12/B1 v1(71.068,91.896) ; J1.A1/B12 70.664,98.096 v1(72.136,99.568) ; v1(72.136,83.947) 72.136,86.868 72.937,87.669 C1.2 ; C7.1 73.621,92.417 v1(73.66,92.456) ; R3.2 73.875,97.116 74.168,97.409 74.676,97.409 74.803,97.536 v1(74.803,99.568) ; R1.2 74.041,98.337 74.041,99.187 74.422,99.568 v1(74.803,99.568) ; v1(74.549,78.486) 75.057,78.994 U1.2 ; C9.1 v1(74.803,99.568) ; U3.5 77.959,89.389 v1(78.74,90.17) ; R2.2 78.243,79.64 v1(78.74,80.137) ; v1(78.359,99.568) C8.1 ; C2.2 78.652,83.478 78.994,83.82 v5(79.756,83.82) ; v1(80.518,81.407) 80.645,81.534 U2.2 ; v1(80.772,77.724) C4.2 ; v1(83.566,78.867) 84.103,78.33 C5.2 ; MD1.1 87.742,81.773 v1(87.757,81.788) ; R11.2 88.48,98.718 v1(89.027,98.171) ; C6.2 92.583,100.457 v1(93.091,100.965) ; SW1.1 95.504,103.632 95.758,103.378 v1(95.758,102.235) ; C3.1 95.504,98.083 v1(95.504,99.441) ; v1(97.79,103.759) J3.2 J3.3 ; v1(99.06,100.076) D2.2 ; v1(99.695,91.948) 99.742,91.995 MD1.10 ; v1(101.727,81.915) 101.742,81.9 MD1.8
IRQ0: MD1.14 U3.15 | length 20.1
  Top Layer w0.254: U3.15 82.518,84.487 82.804,84.201 83.693,84.201 84.582,85.09 87.82,85.09 91.059,85.09 91.694,85.725 91.694,94.697 MD1.14
IRQ1: MD1.15 U3.16 | length 15
  Top Layer w0.254: U3.16 88.789,85.614 89.742,86.567 MD1.15
MISO: MD1.2 U3.13 | length 28.4
  Top Layer w0.254: v2(80.899,83.693) 80.918,83.712 U3.13 ; MD1.2 89.789,79.292 v2(89.789,81.915)
  Bottom Layer w0.254: v2(80.899,83.693) 82.296,83.693 82.423,83.693 82.572,83.842 82.572,84.175 82.673,84.277 82.978,84.277 83.08,84.175 83.08,83.181 83.181,83.079 83.486,83.079 83.588,83.181 83.588,84.175 83.689,84.277 83.994,84.277 84.096,84.175 84.096,83.181 84.197,83.079 84.502,83.079 84.604,83.181 84.604,84.175 84.705,84.277 85.01,84.277 85.112,84.175 85.112,83.181 85.213,83.079 85.518,83.079 85.62,83.181 85.62,84.175 85.721,84.277 86.026,84.277 86.128,84.175 86.128,83.181 86.229,83.079 86.534,83.079 86.636,83.181 86.636,84.175 86.737,84.277 87.042,84.277 87.144,84.175 87.144,83.181 87.245,83.079 87.55,83.079 87.652,83.181 87.652,84.175 87.753,84.277 88.058,84.277 88.16,84.175 88.16,83.181 88.261,83.079 88.566,83.079 88.668,83.181 88.668,83.966 88.769,84.068 89.074,84.068 89.176,83.966 89.176,83.671 89.764,83.083 89.789,83.058 v2(89.789,81.915)
MOSI: MD1.3 U3.14 | length 29.5
  Top Layer w0.254: U3.14 81.718,84.271 82.296,83.693 82.314,83.693 82.998,83.693 83.147,83.544 83.147,83.475 83.248,83.374 83.553,83.374 83.655,83.475 83.655,83.591 83.756,83.693 84.061,83.693 84.163,83.591 84.163,83.275 84.264,83.173 84.569,83.173 84.671,83.275 84.671,84.13 84.772,84.231 85.077,84.231 85.179,84.13 85.179,83.172 85.28,83.07 85.585,83.07 85.687,83.172 85.687,84.13 85.788,84.231 86.093,84.231 86.195,84.13 86.195,83.172 86.296,83.07 86.601,83.07 86.703,83.172 86.703,84.13 86.804,84.231 87.109,84.231 87.211,84.13 87.211,83.172 87.312,83.07 87.617,83.07 87.719,83.172 87.719,84.13 87.82,84.231 88.125,84.231 88.227,84.13 88.227,83.172 88.328,83.07 88.633,83.07 88.735,83.172 88.735,84.13 88.836,84.231 89.141,84.231 89.243,84.13 89.243,83.172 89.344,83.07 89.649,83.07 89.751,83.172 89.751,84.13 89.852,84.231 90.157,84.231 90.259,84.13 90.259,83.172 90.36,83.07 90.665,83.07 90.767,83.172 90.767,83.544 90.916,83.693 91.043,83.693 91.44,83.693 91.742,83.391 MD1.3
NetC1_1: C1.1 D1.1 D3.2 U1.4 | length 21
  Top Layer w0.254: D1.1 64.949,85.673 65.532,85.09 69.596,85.09 70.104,85.598 70.104,88.011 70.358,88.265 C1.1 71.335,86.101 D3.2 71.086,82.711 72.009,81.788 72.771,81.788 73.349,81.21 U1.4
NetC2_1: C2.1 C4.1 J2.1 R6.1 U1.3 U2.1 | length 43.4
  Top Layer w0.254: J2.1 68.802,77.883 69.469,77.216 71.882,77.216 72.39,77.724 72.39,78.74 72.771,79.121 74.041,79.121 74.864,79.944 U1.3 75.749,80.715 75.565,80.899 74.549,80.899 73.914,81.534 73.914,83.566 74.295,83.947 76.581,83.947 77.05,83.478 C2.1 77.05,81.7 77.47,81.28 79.375,81.28 80.579,82.484 U2.1 82.616,82.484 83.566,81.534 85.344,81.534 85.852,81.026 85.852,80.137 85.344,79.629 83.185,79.629 82.521,78.965 C4.1 82.521,77.06 82.296,76.835 79.756,76.835 79.502,77.089 R6.1
NetC6_1: C6.1 R8.2 SW1.2 U3.6 | length 36.3
  Top Layer w0.254: v2(74.422,89.408) 75.241,88.589 U3.6 ; R8.2 90.209,104.736 90.424,104.521 90.424,103.675 SW1.2 90.381,102.151 91.44,101.092 C6.1 v2(91.44,98.806)
  Bottom Layer w0.254: v2(74.422,89.408) 74.422,89.916 74.803,90.297 90.932,90.297 91.44,90.805 v2(91.44,98.806)
NetC8_2: C8.2 U3.2 Y1.1 | length 12.3
  Top Layer w0.254: U3.2 75.216,91.789 74.93,92.075 74.93,93.091 77.724,95.885 77.724,96.901 78.105,97.282 Y1.1 79.756,97.282 80.391,97.917 80.391,99.401 C8.2
NetC9_2: C9.2 U3.3 Y1.2 | length 11.4
  Top Layer w0.254: U3.3 74.746,90.989 74.422,91.313 74.422,93.472 76.474,95.524 Y1.2 76.474,98.445 77.129,99.1 C9.2
NetD1_2: D1.2 F1.2 | length 11
  Top Layer w0.254: D1.2 68.909,88.848 69.342,89.281 71.247,89.281 71.755,89.789 71.755,93.218 72.009,93.472 73.66,93.472 73.875,93.687 F1.2@73.875,94.361
NetD3_1: D3.1 R5.1 | length 3.1
  Top Layer w0.254: R5.1 73.064,85.73 D3.1
NetF1_1: F1.1 J1.A4/B9 J1.B4/A9 | length 9.3
  Top Layer w0.254: J1.A4/B9 69.66,97.346 68.961,96.647 68.961,93.345 69.279,93.027 69.66,92.646 J1.B4/A9 70.929,92.646 71.12,92.837 71.12,93.433 F1.1
NetJ1_A5: J1.A5 R1.1 | length 3.1
  Top Layer w0.254: J1.A5 71.092,96.746 71.628,97.282 72.009,97.282 72.302,97.575 R1.1
NetJ1_B5: J1.B5 R3.1 | length 4.1
  Top Layer w0.254: J1.B5 70.886,93.746 71.12,93.98 71.12,94.234 71.12,95.885 71.501,96.266 R3.1
NetMD1_9: MD1.9 R4.1 | length 3.6
  Top Layer w0.254: R4.1 101.742,98.275 MD1.9
NetR2_1: R2.1 U1.5 | length 6
  Top Layer w0.254: U1.5 73.349,77.273 73.66,76.962 77.47,76.962 77.724,77.216 R2.1
NetR5_2: R5.2 U1.1 | length 7.1
  Top Layer w0.254: R5.2 75.565,82.804 75.819,82.55 75.819,81.534 76.835,80.518 76.835,78.232 76.581,77.978 75.815,77.978 U1.1
NetR6_2: R6.2 U2.3 | length 4.1
  Top Layer w0.254: R6.2 79.502,80.137 80.01,80.645 81.796,80.645 U2.3
NSS: MD1.5 U3.11 | length 28.4
  Top Layer w0.254: U3.11 79.318,88.589 v2(79.375,88.646) ; MD1.5 95.758,79.261 v2(95.758,83.947)
  Bottom Layer w0.254: v2(79.375,88.646) 94.996,88.646 95.758,87.884 v2(95.758,83.947)
RST: MD1.6 R7.2 U3.9 | length 74.9
  Top Layer w0.254: U3.9 77.718,87.878 v4(78.232,88.392) ; R7.2 83.097,99.988 83.693,100.584 83.693,105.537 83.947,105.791 96.393,105.791 96.774,105.41 96.774,91.186 97.663,90.297 v2(97.663,83.82) 97.663,79.324 MD1.6
  Bottom Layer w0.254: v4(78.232,88.392) 78.232,89.154 78.613,89.535 96.52,89.535 97.663,88.392 v2(97.663,83.82)
SCK: MD1.4 U3.12 | length 28.3
  Top Layer w0.254: U3.12 80.137,85.633 v2(80.137,87.63) ; v2(93.726,83.82) 93.742,83.804 MD1.4
  Bottom Layer w0.254: v2(80.137,87.63) 83.058,87.63 83.185,87.63 83.334,87.779 83.334,88.036 83.435,88.138 83.74,88.138 83.842,88.036 83.842,87.34 83.943,87.238 84.248,87.238 84.35,87.34 84.35,88.036 84.451,88.138 84.756,88.138 84.858,88.036 84.858,87.34 84.959,87.238 85.264,87.238 85.366,87.34 85.366,88.036 85.467,88.138 85.772,88.138 85.874,88.036 85.874,87.34 85.975,87.238 86.28,87.238 86.382,87.34 86.382,87.481 86.531,87.63 86.772,87.63 93.345,87.63 93.726,87.249 v2(93.726,83.82)
SCL: P2.6 R9.2 U3.30 | length 32.1
  Top Layer w0.254: P2.6 65.024,102.997 65.278,103.251 80.645,103.251 81.153,102.743 81.153,101.473 82.169,100.457 82.169,98.298 82.677,97.79 83.566,97.79 83.902,97.454 R9.2 83.902,95.84 83.439,95.377 79.502,95.377 79.318,95.193 U3.30
SDA: P2.4 R10.1 U3.31 | length 23.8
  Top Layer w0.254: P2.4 67.564,100.838 67.818,100.584 71.628,100.584 81.153,100.584 81.534,100.203 81.534,98.298 80.854,97.618 R10.1 80.854,96.348 80.391,95.885 78.867,95.885 78.518,95.536 U3.31
SWCLK: P1.2 R11.1 U3.25 | length 12.5
  Top Layer w0.254: U3.25 84.82,93.964 85.725,94.869 85.725,98.933 85.979,99.187 R11.1 86.868,99.275 86.868,101.6 86.487,101.981 P1.2
SWDIO: P1.1 U3.24 | length 20.2
  Top Layer w0.254: U3.24 84.699,92.583 85.979,92.583 86.36,92.964 86.36,96.901 86.741,97.282 89.281,97.282 89.916,97.917 89.916,99.822 89.408,100.33 88.138,100.33 87.503,100.965 87.503,103.759 86.741,104.521 P1.1
UART_RX: J4.4 U3.21 | length 21.4
  Top Layer w0.254: v2(81.661,92.075) 82.296,92.075 82.804,91.567 82.804,90.551 83.166,90.189 U3.21
  Bottom Layer w0.254: J4.4 77.216,104.521 77.851,103.886 77.851,92.837 78.613,92.075 v2(81.661,92.075)
UART_TX: J4.3 U3.19 | length 20.7
  Top Layer w0.254: v2(81.026,91.059) 81.534,91.059 82.042,90.551 82.042,89.027 82.48,88.589 U3.19
  Bottom Layer w0.254: J4.3 76.327,91.948 77.216,91.059 v2(81.026,91.059)
pads on no net: J1. J1.1 J1.2 J1.3 J1.4 J1.5 J1.6 J1.A6 J1.A7 J1.A8 J1.B6 J1.B7 J1.B8 J2.3 J2.4 MD1.7 MD1.11 MD1.12 MD1.16 P1.5 P1.6 U2.4 U3.1 U3.10 U3.17 U3.18 U3.20 U3.22 U3.23 U3.26 U3.27 U3.28 U3.29 U3.32

## Polygon pours and split planes (outlines as drawn)
GND on Layer 2 "NONET_L-01_P-001" (solid, pour order 2): 63.373,106.045 102.997,106.045 102.997,76.581 102.995,76.583 63.372,76.583 63.372,106.044
3.3V on Layer 1 "NONET_L-01_P-001" (solid, pour order 1): 96.901,105.918 63.5,105.918 63.5,76.708 102.743,76.708 102.743,88.265 98.679,88.265 97.155,89.789 97.155,105.664

## Silkscreen, mask and mechanical layers (free items; w line width, h text height)
Top Overlay:
  text "-" at 65.532,82.993 h1
  text "+" at 69.596,82.827 h1
Bottom Overlay:
  text "3.3V" at 70.485,105.67 h0.5
  text "GND" at 82.931,105.67 h0.5
  text "SWDIO" at 85.725,105.67 h0.5
  text "ADC_IN1" at 65.786,105.626 h0.5
  text "ADC_IN0" at 68.453,105.626 h0.5
  text "UART_RX" at 77.343,105.626 h0.5
  text "GND" at 74.295,105.543 h0.5
  text "UART_TX" at 77.343,100.546 h0.5
  text "SCL" at 65.405,100.463 h0.5
  text "SDA" at 67.945,100.463 h0.5
  text "GND" at 70.612,100.463 h0.5
  text "3.3V" at 74.168,100.463 h0.5
  text "3.3V" at 82.804,100.463 h0.5
  text "SWCLK" at 85.725,100.463 h0.5
Mechanical 1:
  lines w0.254: 63.119,76.3 63.119,106.3 ; 63.119,76.327 103.251,76.327 103.251,106.299 63.119,106.299